# Altium PCB Charge Station.PcbDoc
Units mm, origin at the board's own origin, x right, y up, seen from the top; angles counter-clockwise.
Board outline 49.53 x 79.38 mm, 2 copper layers (Top Layer, Bottom Layer); 26 components, 14 nets, 78 pads, 54 vias.
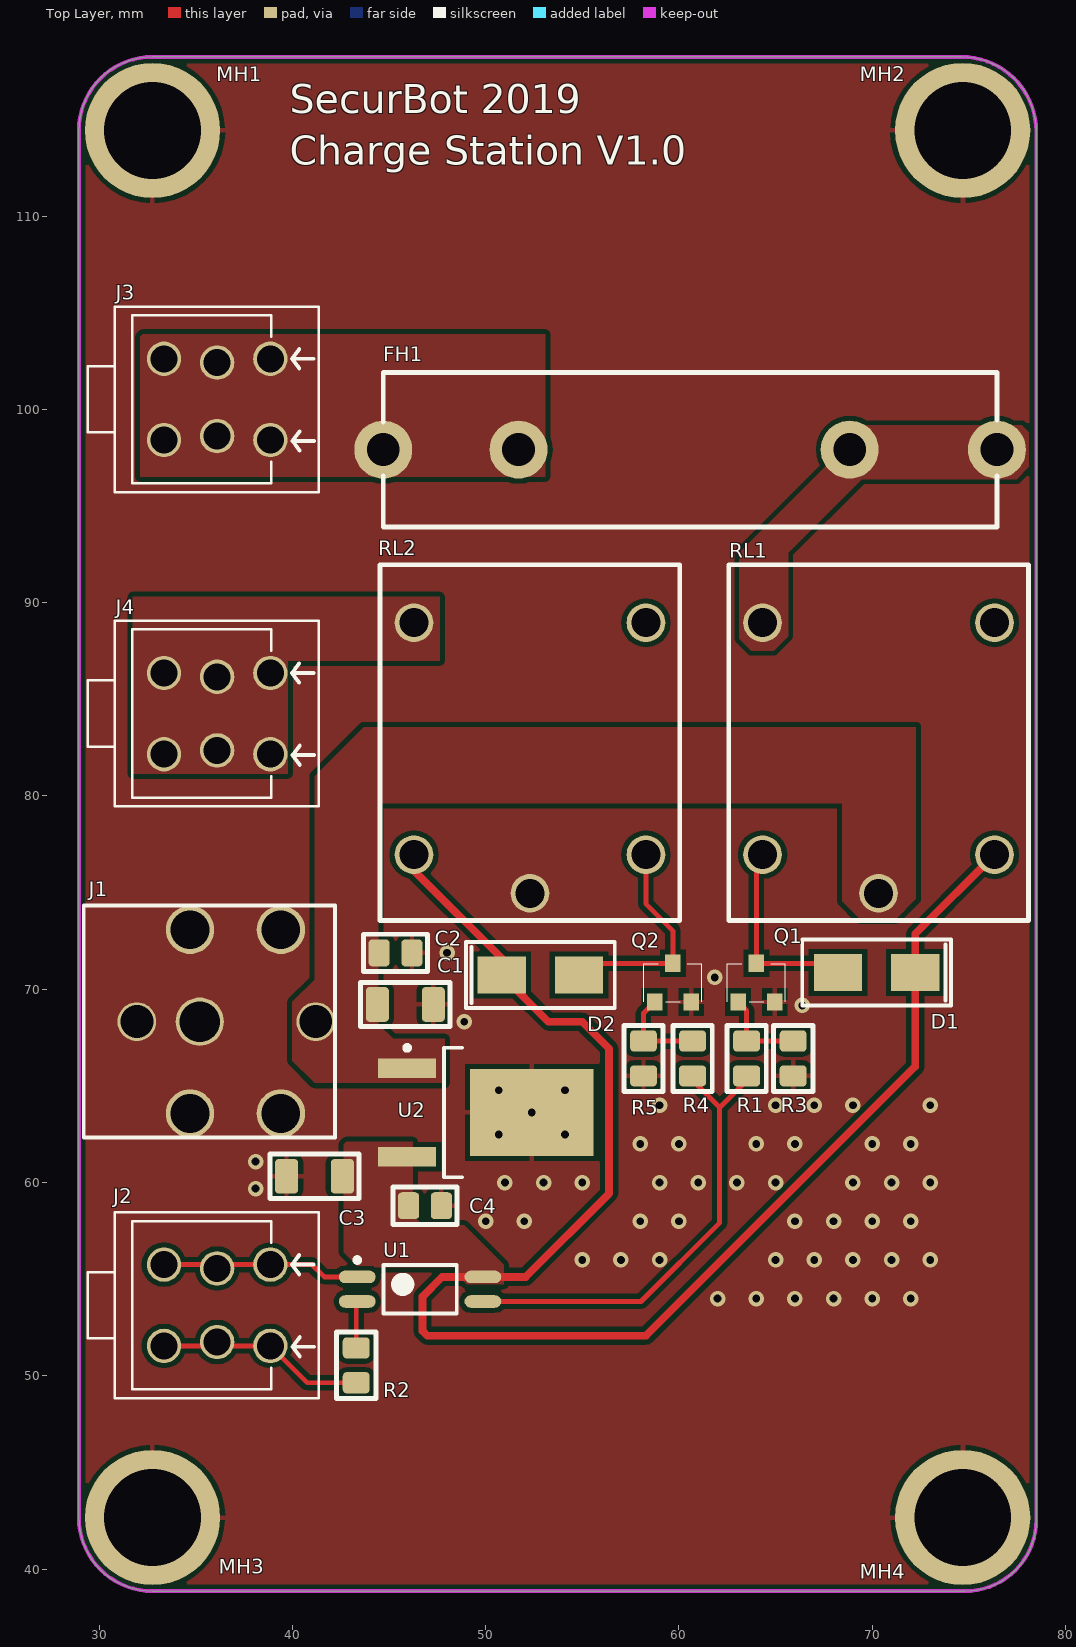
[diagram p0: Top Layer view]
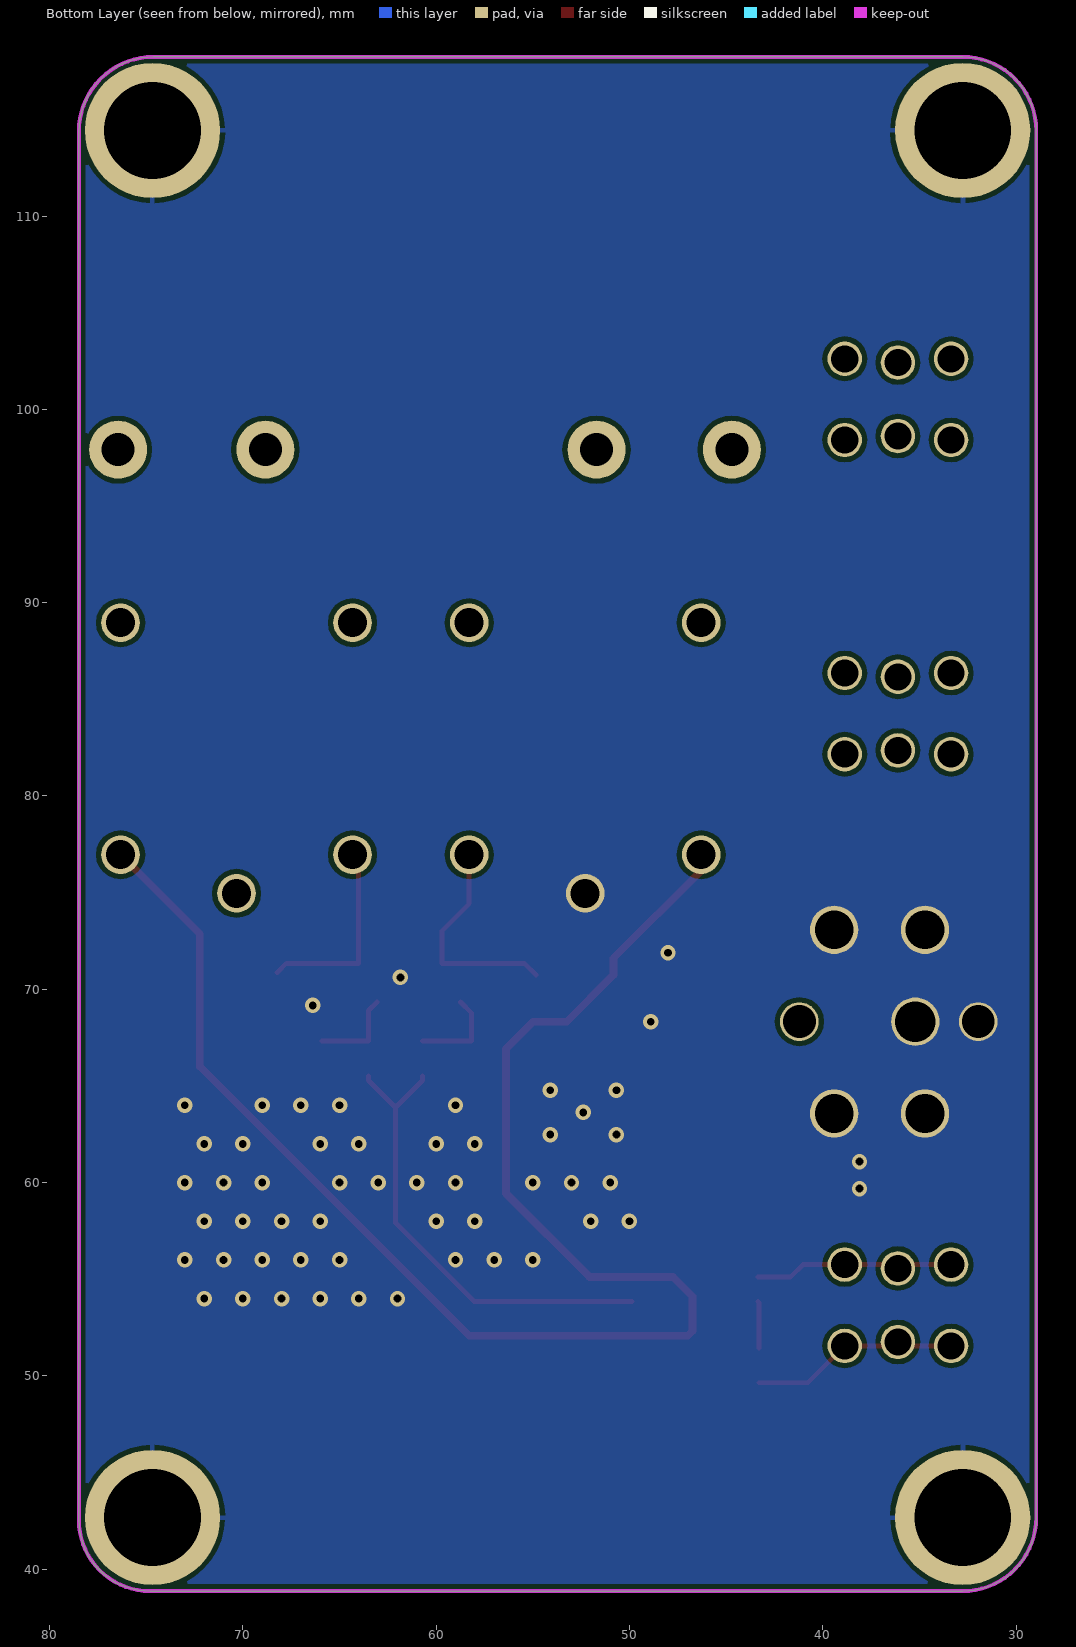
[diagram p1: Bottom Layer view, seen from below]
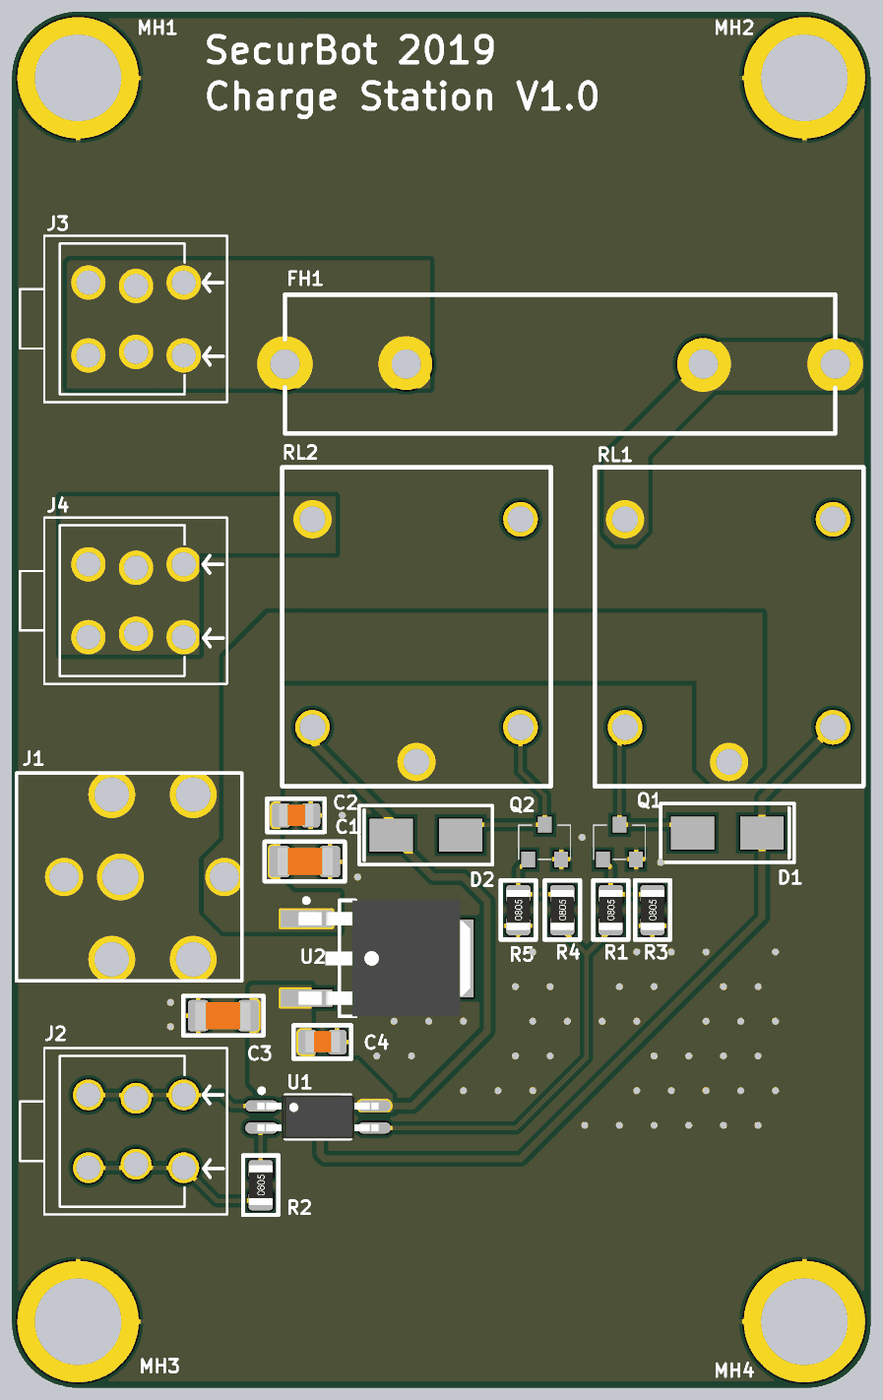
[diagram p2: 3D render of the assembled board from above, using the file's embedded part models]

## Layer stack, top to bottom
Top Solder: solder mask 0.0102, Solder Resist, Dk 3.5
Top Layer: signal copper 0.0356
Dielectric 1: dielectric 0.32, FR-4, Dk 4.8
Bottom Layer: signal copper 0.0356
Bottom Solder: solder mask 0.0102, Solder Resist, Dk 3.5

## Board outline
32.766,38.862 cw(c32.766,42.672) 28.956,42.672 28.956,114.427 cw(c32.766,114.427) 32.766,118.237 74.624,118.237 cw(c74.624,114.375) 78.486,114.375 78.486,42.545 cw(c74.803,42.545) 74.803,38.862

## Design rules (kind name [scope] priority, off if disabled: settings)
Clearance [All] p1: gap=0.254
PolygonConnect [InNet('GND') vs IsVia] p1: connectstyle=Direct reliefconductorwidth=0.254 reliefentries=4 polygonreliefangle="45 Angle" airgapwidth=0.254
PolygonConnect Test1 [InComponent(J1) or InComponent(J2) or InComponent(J3)or InComponent('RL2')] p2: connectstyle=Direct reliefconductorwidth=0.254 reliefentries=4 polygonreliefangle="90 Angle" airgapwidth=0.254
PolygonConnect PolygonConnect_2 [InNet('GND')] p3: connectstyle=Relief reliefconductorwidth=0.254 reliefentries=4 polygonreliefangle="90 Angle" airgapwidth=0.254
PolygonConnect PolygonConnect_3 [All] p4: connectstyle=Direct reliefconductorwidth=0.254 reliefentries=4 polygonreliefangle="90 Angle" airgapwidth=0.254
RoutingVias [All] p1: holewidth=0.711 width=1.27 viastyle="Through Hole" minholewidth=0.711 minwidth=1.27 maxholewidth=0.711 maxwidth=1.27
SolderMaskExpansion [All] p1: expansion=0.102
Width [All] p1: maxlimit=0.4 minlimit=0.254 preferedwidth=0.254 minimp=50.000000 maximp=50.000000 favimp=50.000000
30 further rules are at their usual default settings.

## Classes and differential pairs
component class Title: MH1 MH2 MH3 MH4
component class "Charge Station": C1 C2 C3 C4 D1 D2 FH1 J1 J2 J3 J4 Q1 Q2 R1 R2 R3 R4 R5 RL1 RL2 U1 U2

## Components (designator, comment, footprint, x,y, rotation, side; value= is the part's Value field where it differs from the comment)
C1 "CAP - 1206" CAP_1206 45.847,69.215 r0 top
C2 "CAP - 0805" CAP_0805 45.339,71.882 r0 top
C3 "CAP - 1206" CAP_1206 41.148,60.325 r180 top
C4 "CAP - 0805" CAP_0805 46.863,58.801 r0 top
D1 "SCHOTTKEY" DO-214AC_SOD128 70.231,70.866 r180 top
D2 "SCHOTTKEY" DO-214AC_SOD128 52.832,70.739 r0 top
FH1 "FH 3AB-3AG" FH_3AB_3AG 44.704,97.917 r0 top
J1 "Barrel 5.5x2.5mm" "Barrel 5.5mm 2.5mm" 29.21,68.326 r0 top
J2 "MOLEX 4 POS - TERMINAL BLOCK 2 POS" MOLEX4POS_TERMBLOCK2POS 38.862,55.753 r270 top
J3 "MOLEX 4 POS - TERMINAL BLOCK 2 POS" MOLEX4POS_TERMBLOCK2POS 38.862,102.616 r270 top
J4 "MOLEX 4 POS - TERMINAL BLOCK 2 POS" MOLEX4POS_TERMBLOCK2POS 38.862,86.36 r270 top
MH1 "Mounting Hole 6/32" MH_ENG_6-32 32.766,114.427 r0 top
MH2 "Mounting Hole 6/32" MH_ENG_6-32 74.676,114.427 r0 top
MH3 "Mounting Hole 6/32" MH_ENG_6-32 32.766,42.672 r0 top
MH4 "Mounting Hole 6/32" MH_ENG_6-32 74.676,42.672 r0 top
Q1 "NMOS" SOT-23 64.008,69.342 r0 top
Q2 "NMOS" SOT-23 59.69,69.342 r0 top
R1 "RES - 0805" RES_0805 63.5,66.421 r90 top
R2 "RES - 0805" RES_0805 43.307,50.546 r90 top
R3 "RES - 0805" RES_0805 65.913,66.421 r90 top
R4 "RES - 0805" RES_0805 60.706,66.421 r90 top
R5 "RES - 0805" RES_0805 58.166,66.421 r90 top
RL1 "Relay SPDT" ORWH-SH 76.327,76.962 r90 top
RL2 "Relay SPDT" ORWH-SH 58.293,76.962 r90 top
U1 "Optoisolator" SOIC127P700X200-4M 46.609,54.483 r0 top
U2 "UA78M" DPAK229P991X252-3N 50.038,63.627 r0 top

## Footprints (in the part's own frame and the unit in brackets; to place one, negate y for a bottom-side part, rotate by r counter-clockwise, add the part's x,y. Pads: shape width x height; smd on the part's side, far side on the other; paste and mask are expansions set on the pad)
"Barrel 5.5mm 2.5mm" [mm]
  round 2 hole 1.7: 1(12,0) 3(2.75,0)
  round 2.5 hole 2.1: 2(6,0)
  round 2.5 hole 2: 3(5.5,-4.75) 3(5.5,4.75) 3(10.2,-4.75) 3(10.2,4.75)
  silkscreen extent 0,-6 13,6
CAP_0805 [mil]
  rrect37% 43x55 smd: 1(-33.5,0) 2(33.5,0)
  silkscreen extent -66,-38 66,38, body extent -39,-24 40,25, height 49
CAP_1206 [mil]
  rrect34% 47x71 smd: 1(-57,0) 2(57,0)
  silkscreen extent -91,-45 91,45, body extent -62,-31 64,32, height 49
DO-214AC_SOD128 [mm] "In between DO-214AC and SOD128 diode package for easy diode change"
  rect 2.5x1.9 smd: 1(2,0) 2(-2,0)
  silkscreen extent -3.85,-1.7 3.85,1.7
DPAK229P991X252-3N [mm] "D-PAK, 3-Pads, Body 6,21x6,72mm (max), IPC Medium Density"
  rect 3x1 smd: 1(-4.1,2.29) 3(-4.1,-2.29)
  rect 6.4x4.5 smd: 2(2.35,0)
  silkscreen extent -4.22,-3.35 -1.25,3.46, body extent -4.55,-3.35 5.36,3.35, height 2.52
FH_3AB_3AG [mm]
  round 3 hole 1.7: 1(0,0) 1(7,0) 2(24.13,0) 2(31.75,0)
  silkscreen extent 0,-4 31.75,4
MH_ENG_6-32 [mm] "Mounting hole - Imperial 6-32"
  round 7 hole 5: 1(0,0)
MOLEX4POS_TERMBLOCK2POS [mm]
  round 1.78 hole 1.4: 1(0,0) 2(4.2,0) 3(0,-5.5) 4(4.2,-5.5) 5(0.195,-2.75) 6(4,-2.75)
  silkscreen extent -2.7,-9.45 6.9,2.5
ORWH-SH [mm]
  round 2 hole 1.5: 1(0,12) 2(-2,6) 3(0,0) 4(12,0) 5(12,12)
  silkscreen extent -3.4,-1.75 15,13.75
RES_0805 [mil]
  rrect37% 43x55 smd: 1(-35.5,0) 2(35.5,0)
  silkscreen extent -68,-40 68,40, body extent -45,-27 45,27, height 30
SOIC127P700X200-4M [mm] "SOIC, 4-Leads, Body 2,70x4,40mm, Pitch 1,27mm, IPC Low Density"
  oval 1.9x0.65 smd: 1(-3.25,0.635) 2(-3.25,-0.635) 3(3.25,-0.635) 4(3.25,0.635)
  silkscreen extent -3.37,-1.25 1.9,1.63, body extent -3.5,-1.25 3.5,1.25, height 2
SOT-23 [mm]
  rect 0.8x0.9 smd: 1(0.95,0) 2(-0.95,0) 3(0,2)
  silkscreen extent -1.5,0 1.5,1.97

## Part data
FH1: "Fuse holder (3AB-3AG)"
J1: "Jack 5.5x2.5mm"
MH1 MH2 MH3 MH4: library part "MH - 6-32"

## Via types
v1: diameter 0.8, hole 0.4, Top Layer to Bottom Layer, tented top, 43 vias
v2: diameter 0.8, hole 0.4, Top Layer to Bottom Layer, tented both sides, 11 vias

## Nets (pads, with @x,y where several pads share a name; then routed paths per layer and width w, separated by ;. In a path a pad name is that pad's centre, name@x,y a point inside that pad or via, vN(x,y) a via of type N, cw(c..) or ccw(c..) an arc to the next point about the centre after c; other vN are vias at no path point)
GND: C1.2 C2.2 C3.2 C4.2 J1.2 J1.3 MH1.1 MH2.1 MH3.1 MH4.1 Q1.1 Q2.1 R3.1 R5.1 RL2.2 U2.2
  other v1: 62,54 64,54 66,54 68,54 70,54 72,54 55,56 57,56 59,56 65,56 67,56 69,56 71,56 73,56 50,58 52,58 58,58 60,58 66,58 68,58 70,58 72,58 51,60 53,60 55,60 59,60 61,60 63,60 65,60 69,60 71,60 73,60 58,62 60,62 64,62 66,62 70,62 72,62 59,64 65,64 67,64 69,64 73,64
  other v2: 38.1,59.69 38.1,61.087 50.673,62.484 54.102,62.484 52.388,63.627 50.673,64.77 54.102,64.77 48.895,68.326 66.381,69.166 61.849,70.612 48.006,71.882
NetD1_1: D1.1 Q1.3 RL1.1 | length 10.2
  Top Layer w0.254: RL1.1 64.008,76.643 Q1.3 67.755,71.342 D1.1
NetD2_1: D2.1 Q2.3 RL2.3 | length 11.3
  Top Layer w0.254: D2.1 55.435,71.342 Q2.3 59.69,73.025 58.293,74.422 RL2.3
NetFH1_2: FH1.2 RL1.5
NetJ2_1: J2.1 J2.3 J2.5 U1.1 | length 10.3
  Top Layer w0.254: J2.3 41.021,55.753 41.656,55.118 U1.1
NetJ2_2: J2.2 J2.4 J2.6 R2.1 | length 10.7
  Top Layer w0.254: J2.4 J2.2 40.771,49.644 R2.1
NetQ1_2: Q1.2 R1.2 R3.2 | length 4.6
  Top Layer w0.254: Q1.2 63.5,68.9 R1.2 R3.2
NetQ2_2: Q2.2 R4.2 R5.2 | length 4.8
  Top Layer w0.254: Q2.2 58.166,68.768 R5.2 R4.2
NetR1_1: R1.1 R4.1 U1.3 | length 24.3
  Top Layer w0.254: U1.3 58.039,53.848 62.103,57.912 62.103,63.881 ; R4.1 60.706,65.278 62.103,63.881 ; R1.1 63.5,65.278 62.103,63.881
NetR2_2: R2.2 U1.2 | length 2.4
  Top Layer w0.254: R2.2 43.307,53.796 U1.2
OUTPUT_GND: J4.1 J4.2 J4.3 J4.4 J4.5 J4.6 RL2.5
P5V0: C3.1 C4.1 D1.2 D2.2 RL1.3 RL2.1 U1.4 U2.3 | length 80.3
  Top Layer w0.4: RL2.1@46.293,76.835 46.293,76.135 50.832,71.596 D2.2 53.245,68.326 54.991,68.326 56.388,66.929 56.388,59.436 52.07,55.118 U1.4 47.752,55.118 46.736,54.102 46.736,52.324 46.99,52.07 58.293,52.07 72.231,66.008 D1.2 72.231,72.866 RL1.3
VJACK: C1.1 C2.1 J1.1 RL1.2 U2.1
VOUTPUT: FH1.1 J3.1 J3.2 J3.3 J3.4 J3.5 J3.6
pads on no net: RL1.4 RL2.4

## Polygon pours and split planes (outlines as drawn)
VJACK on Top Layer "VJACK" (solid, remove dead copper, pour order 12): 40.005,66.294 41.148,65.151 43.815,65.151 47.879,65.151 47.879,67.437 45.212,67.437 44.45,68.199 44.45,79.629 68.453,79.629 68.453,74.549 69.342,73.66 71.247,73.66 72.263,74.676 72.263,83.566 43.688,83.566 41.148,81.026 41.148,70.485 40.005,69.342
P5V0 on Top Layer "P5V0" (solid, remove dead copper, pour order 14): 49.022,54.737 50.927,54.737 50.927,55.753 48.895,57.785 48.26,57.785 46.736,57.785 46.609,57.912 46.228,58.293 46.228,59.944 46.228,62.103 42.799,62.103 42.672,61.976 42.672,57.785 42.672,56.388 43.053,56.007 43.434,55.626 48.514,55.626 48.514,55.245
NetFH1_2 on Top Layer "OUPUT" (solid, remove dead copper, pour order 16): 63.119,89.916 63.119,88.138 63.754,87.503 64.897,87.503 65.659,88.265 65.659,89.916 65.659,92.583 69.469,96.393 77.343,96.393 77.47,96.393 78.105,97.028 78.105,98.806 77.724,99.187 68.58,99.187 68.453,99.187 67.818,98.552 67.691,98.425 67.691,97.155 63.119,92.583
VOUTPUT on Top Layer "VOUTPUT" (solid, remove dead copper, pour order 18): 53.086,96.52 32.131,96.52 32.131,103.759 32.258,103.886 53.086,103.886
OUTPUT_GND on Top Layer "OUTGND" (solid, remove dead copper, pour order 20): 31.75,87.63 31.75,81.153 39.751,81.153 39.751,86.995 47.625,86.995 47.625,90.297 31.75,90.297
GND on Top Layer "GND" (solid, remove dead copper, pour order 22): 28.956,118.237 28.956,38.989 78.359,38.989 78.359,49.657 78.359,118.237
GND on Bottom Layer "GND" (solid, remove dead copper, pour order 24): 28.956,118.491 28.956,39.243 78.359,39.243 78.359,49.911 78.359,118.491

## Keep-outs
Keep-Out Layer:
  lines w0.2: 28.956,42.672 ccw(c32.766,42.672) 32.766,38.862 74.803,38.862 ccw(c74.803,42.545) 78.486,42.545 78.486,114.375 ccw(c74.624,114.375) 74.624,118.237 32.766,118.237 ccw(c32.766,114.427) 28.956,114.427 28.956,44.831 28.956,42.672

## Silkscreen, mask and mechanical layers (free items; w line width, h text height)
Top Overlay:
  text "SecurBot 2019" at 39.878,115.316 h1.5
  text "Charge Station V1.0" at 39.878,112.649 h1.5
Bottom Solder:
  rectangle: 49.149,52.959 74.549,65.913